# Altium PCB cc-tester.PcbDoc
Units mm, origin at the board's own origin, x right, y up, seen from the top; angles counter-clockwise.
Board outline 80 x 36 mm, 2 copper layers (Top Layer, Bottom Layer); 36 components, 29 nets, 144 pads, 86 vias.
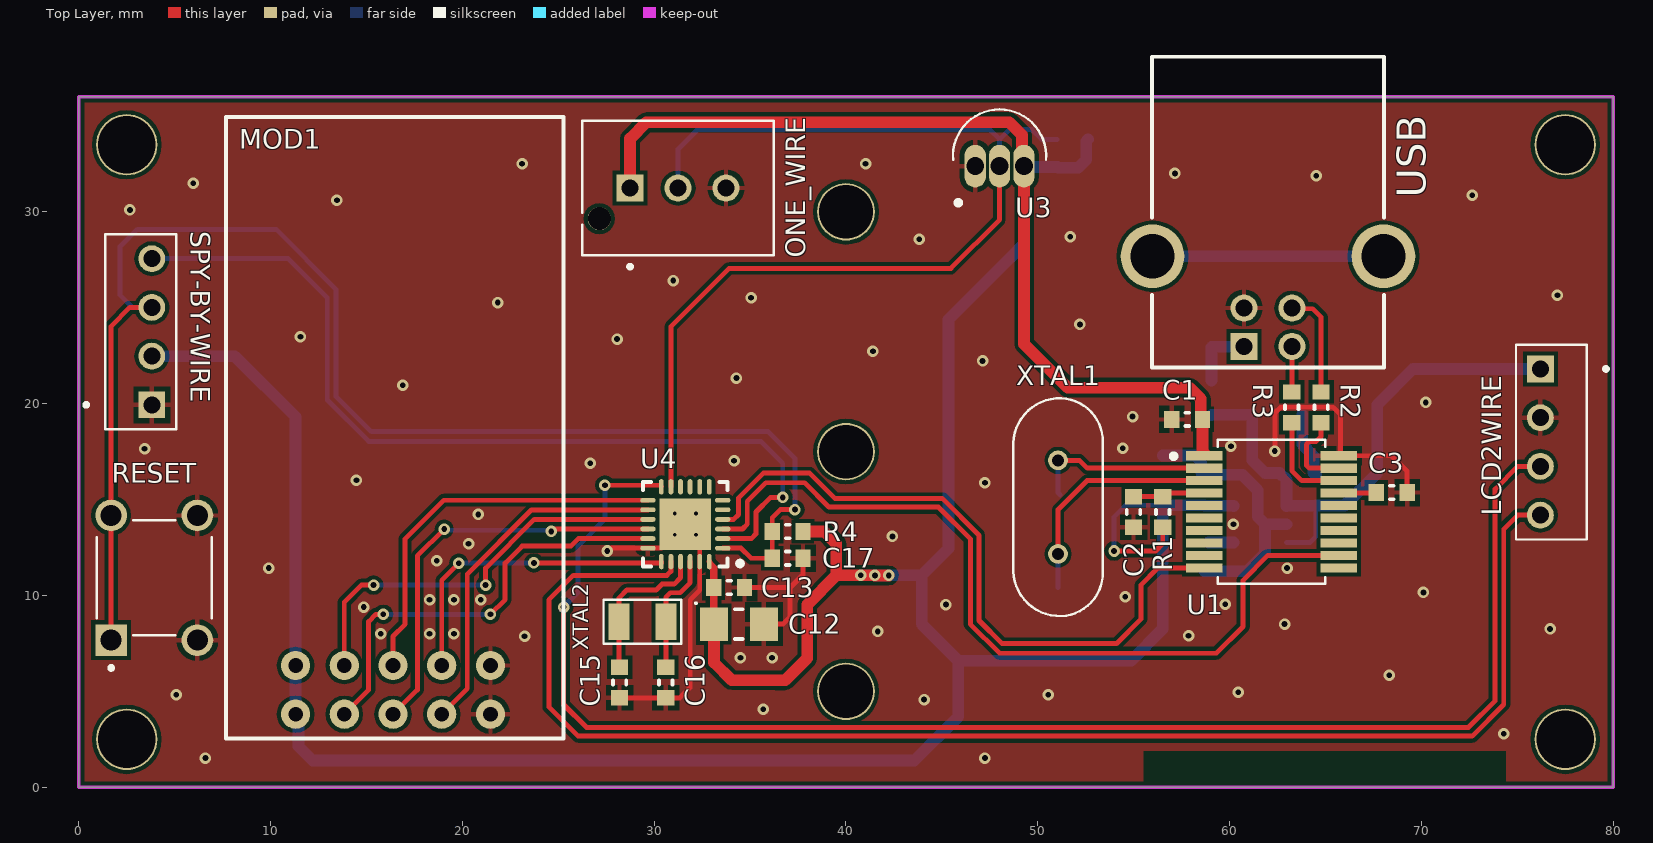
[diagram p0: Top Layer view]
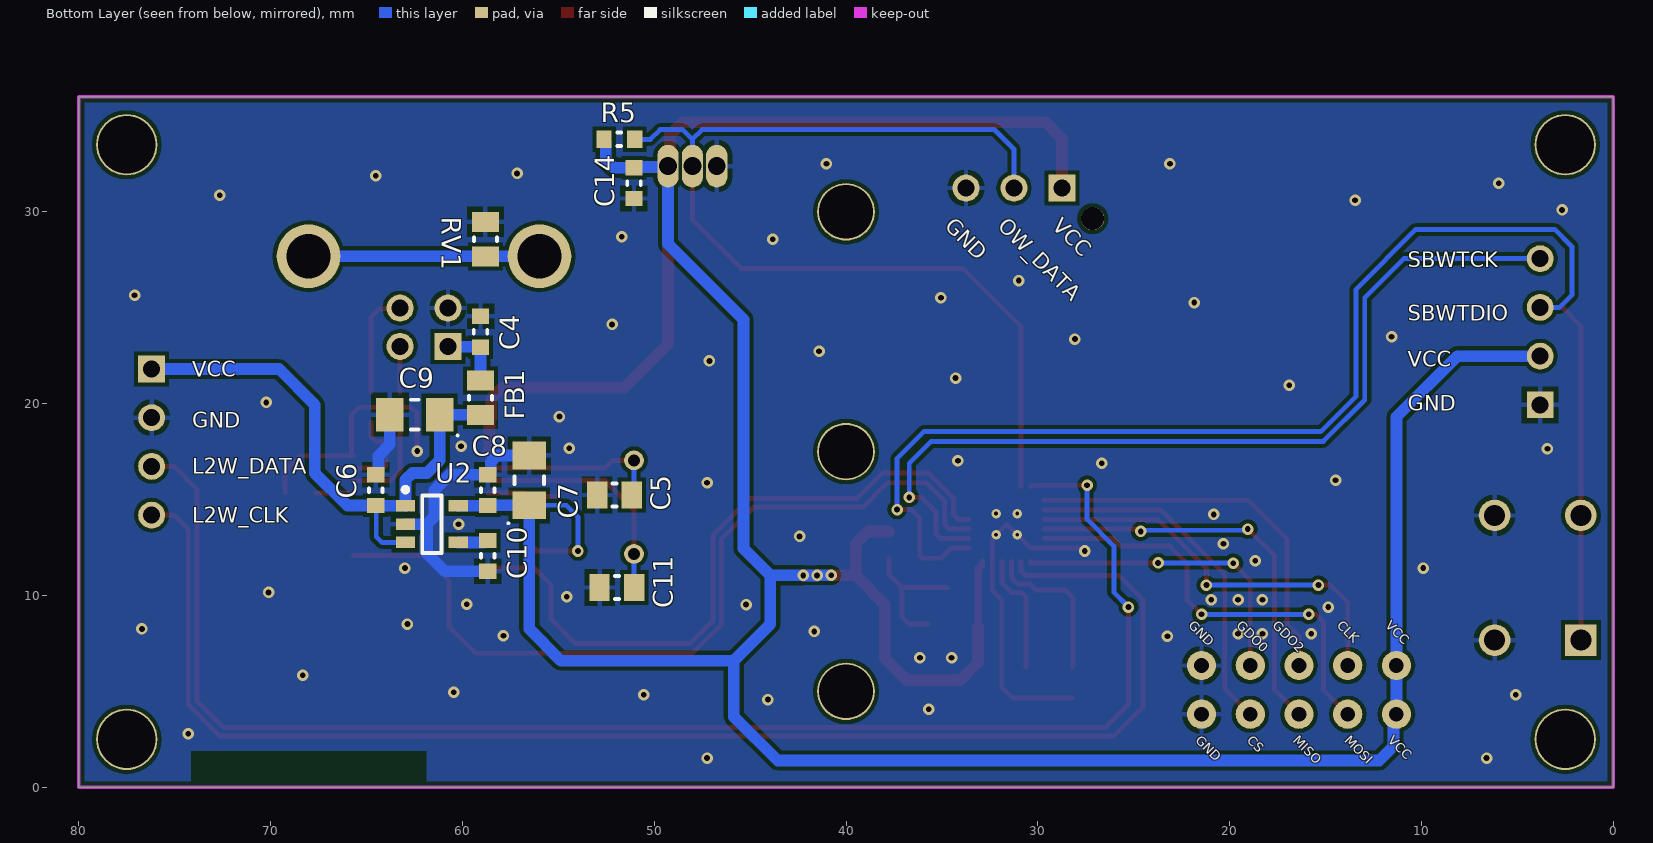
[diagram p1: Bottom Layer view, seen from below]

## Layer stack, top to bottom
Top Solder: solder mask 0.0102, Solder Resist, Dk 3.5
Top Layer: signal copper 0.0356
Dielectric 1: dielectric 0.32, FR-4, Dk 4.8
Bottom Layer: signal copper 0.0356
Bottom Solder: solder mask 0.0102, Solder Resist, Dk 3.5

## Board outline
0,0 80,0 80,36 0,36

## Design rules (kind name [scope] priority, off if disabled: settings)
Clearance [All] p1: gap=0.2 ignorepadtopadclearanceinfootprint=FALSE except(0: Arc-Hole Track-Hole SMDPad-Hole THPad-Hole Via-Hole Fill-Hole Poly-Hole Region-Hole Text-Hole; 0.127: Arc-SMDPad Arc-THPad Arc-Text Track-SMDPad Track-THPad Track-Text SMDPad-SMDPad SMDPad-THPad SMDPad-Text THPad-THPad THPad-Text Via-Text Fill-Text Poly-Text Region-Text Text-Text)
PolygonConnect [All] p1: thpad.connectstyle=Relief thpad.reliefconductorwidth=0.254 thpad.reliefentries=4 thpad.polygonreliefangle="90 Angle" thpad.airgapwidth=0.254 smdpad.connectstyle=Relief smdpad.reliefconductorwidth=0.254 smdpad.reliefentries=4 smdpad.polygonreliefangle="90 Angle" smdpad.airgapwidth=0.254 via.connectstyle=Direct via.reliefconductorwidth=0.254 via.reliefentries=4 via.polygonreliefangle="90 Angle" via.airgapwidth=0.254
RoutingVias [All] p1: holewidth=0.711 width=1.27 viastyle="Through Hole" minholewidth=0.711 minwidth=1.27 maxholewidth=0.711 maxwidth=1.27
SolderMaskExpansion [All] p1: expansion=0.102 istentingtop=FALSE
Width [All] p1: maxlimit=2.54 minlimit=0.254 preferedwidth=0.254 minimp=50.000000 maximp=50.000000 favimp=50.000000
30 further rules are at their usual default settings.

## Components (designator, comment, footprint, x,y, rotation, side; value= is the part's Value field where it differs from the comment)
C1 "100nF" "SMD 0603 GENERIC" 57.785,19.177 r180 top
C2 "100nF" "SMD 0603 GENERIC" 54.991,14.351 r90 top
C3 "100nF" "SMD 0603 GENERIC" 68.453,15.367 r0 top
C4 "10nF" "SMD 0603 GENERIC" 59.055,23.749 r90 bottom
C5 "22pF" "SMD 0805 GENERIC" 52.07,15.24 r180 bottom
C6 "100nF" "SMD 0603 GENERIC" 64.516,15.494 r270 bottom
C7 "10uF" "SMD 1206 POLARIZED" 56.515,16.002 r90 bottom
C8 "100nF" "SMD 0603 GENERIC" 58.674,15.494 r270 bottom
C9 "10uF" "SMD 1206 POLARIZED" 62.484,19.431 r0 bottom
C10 "10nF" "SMD 0603 GENERIC" 58.674,12.065 r90 bottom
C11 "22pF" "SMD 0805 GENERIC" 51.943,10.414 r180 bottom
C12 "4,7uF" "SMD 1206 POLARIZED" 34.417,8.509 r0 top
C13 "100nF" "SMD 0603 GENERIC" 33.909,10.414 r180 top
C14 "100nF" "SMD 0603 GENERIC" 51.054,31.496 r90 bottom
C15 "12pF" "SMD 0603 GENERIC" 28.194,5.461 r90 top
C16 "12pF" "SMD 0603 GENERIC" 30.607,5.461 r90 top
C17 "1nF" "SMD 0603 GENERIC" 36.957,11.938 r180 top
FB1 "11R 100 MHz 1.5A" "SMD 0805 GENERIC" 59.055,20.309 r90 bottom
LCD2WIRE "LCD2WIRE" "THT CON 4-PIN 2.54 WHITE" 76.2,18 r270 top (schematic designator J2)
MOD1 "CC1101" "THT MOD CC1101 433 MHz AMAZON" 25.273,2.54 r90 top
ONE_WIRE "" "THT CON TE 1744418-3 2.5" 31.242,31.242 r0 top (schematic designator J3)
R1 "10K" "SMD 0603 GENERIC" 56.515,14.351 r270 top
R2 "22R" "SMD 0603 GENERIC" 64.77,19.812 r270 top
R3 "22R" "SMD 0603 GENERIC" 63.246,19.812 r270 top
R4 "47K" "SMD 0603 GENERIC" 36.957,13.335 r0 top
R5 "4K7" "SMD 0603 GENERIC" 51.816,33.782 r0 bottom
RESET "RESET" "THT SWC OMRON B3F-1022" 3.81,10.922 r90 top (schematic designator S1)
RV1 "18VDC 180pF" "SMD 0805 GENERIC" 58.801,28.575 r270 bottom
SPY-BY-WIRE "SPY-BY-WIRE" "THT CON 4-PIN 2.54 WHITE" 3.81,23.749 r90 top (schematic designator J4)
U1 "MCP2200-I/SS" "SMD SSOP-20" 62.103,14.478 r0 top
U2 "TPS79333DBVR" SOT23-5 61.595,13.716 r180 bottom
U3 "DS18B20" "THT TO-92 SMALL" 48.006,32.383 r0 top
U4 "MSP430FR2433" VQFN-24 31.623,13.716 r180 top
USB "USB" "THT CON USB 2.0 RA" 62,27.305 r180 top (schematic designator J1)
XTAL1 "12.0 MHz" "THT XTAL HC49" 51.054,14.605 r90 top
XTAL2 "32.768 KHz" "SMD-2 XTAL ABRACON" 29.388,8.636 r180 top

## Footprints (in the part's own frame and the unit in brackets; to place one, negate y for a bottom-side part, rotate by r counter-clockwise, add the part's x,y. Pads: shape width x height; smd on the part's side, far side on the other; paste and mask are expansions set on the pad)
"SMD 0603 GENERIC" [mm]
  rect 0.8x0.9 smd: 1(-0.8,0) 2(0.8,0)
  silkscreen extent -0.1,-0.35 0.1,0.35, body extent -0.85,-0.45 0.85,0.45, height 0.55
"SMD 0805 GENERIC" [mm]
  rect 1.05x1.4 smd: 1(-0.9,0) 2(0.9,0)
  silkscreen extent -0.1,-0.6 0.1,0.6, body extent -1.05,-0.7 1.05,0.7, height 0.6
"SMD 1206 POLARIZED" [mm] "BAUFORM A"
  rect 1.45x1.75 smd: 1(-1.3,0) 2(1.3,0)
  silkscreen extent -2.29,-0.77 0.2,1.14, body extent -1.65,-0.85 1.65,0.85, height 1.6
"SMD SSOP-20" [mm]
  rect 1.9x0.48 smd: 1(-3.429,2.809) 2(-3.429,2.159) 3(-3.429,1.509) 4(-3.429,0.859) 5(-3.429,0.209) 6(-3.429,-0.441) 7(-3.429,-1.091) 8(-3.429,-1.741) 9(-3.429,-2.391) 10(-3.429,-3.041) 11(3.581,-3.041) 12(3.581,-2.391) 13(3.581,-1.741) 14(3.581,-1.091) 15(3.581,-0.441) 16(3.581,0.209) 17(3.581,0.859) 18(3.581,1.509) 19(3.581,2.159) 20(3.581,2.809)
  silkscreen extent -5.12,-3.87 2.88,3.63, body extent -3.85,-3.7 3.95,3.5, height 2
"SMD-2 XTAL ABRACON" [mil]
  rect 43x75 smd: 1(-48,0) 2(48,0)
  silkscreen extent -80,-45 80,45, body extent -98,-65 99,65, height 51
SOT23-5 [mm]
  rect 1x0.6 smd: 1(-1.375,0.95) 2(-1.375,0) 3(-1.375,-0.95) 4(1.375,-0.95) 5(1.375,0.95)
  silkscreen extent -1.5,-1.5 0.5,1.92, body extent -0.88,-1.5 0.87,1.5, height 1.45
"THT CON 4-PIN 2.54 WHITE" [mm]
  rect 1.398x1.398 hole 0.89: 1(-3.81,0)
  round 1.398 hole 0.89: 2(-1.27,0) 3(1.27,0) 4(3.81,0)
  silkscreen extent -5.08,-1.27 5.08,3.52, body extent -5.08,-1.25 5.08,2.4, height 9.5
"THT CON TE 1744418-3 2.5" [mm]
  rect 1.408x1.408 hole 0.9: 1(-2.5,0)
  round 1.408 hole 0.9: 2(0,0) 3(2.5,0)
  round 1.2 hole 1.2 unplated: ""(-4.1,-1.6)
  silkscreen extent -5,-4.2 5,3.5, body extent -5,-3.3 5,3.23, height 8.8
"THT CON USB 2.0 RA" [mm]
  rect 1.408x1.408 hole 0.9: 1(1.25,4.319)
  round 1.408 hole 0.9: 2(-1.25,4.319) 3(-1.25,2.319) 4(1.25,2.319)
  round 3.316 hole 2.3: S1(-6.02,-0.381) S2(6.02,-0.381)
  silkscreen extent -6.05,-10.78 6.05,5.42, body extent -7.25,-10.89 7.25,5.61, height 10.7
"THT MOD CC1101 433 MHz AMAZON" [mil]
  round 60 hole 30: 1(50,550) 2(150,550) 3(50,450) 4(150,450) 5(50,350) 6(150,350) 7(50,250) 8(150,250) 9(50,150) 10(150,150)
  silkscreen extent 0,0 1276,693, body extent -98,0 1270,691, height 118
"THT SWC OMRON B3F-1022" [mm]
  rect 1.65x1.65 hole 1.1: 1(-3.25,2.123)
  round 1.65 hole 1.1: 2(3.25,2.123) 3(-3.25,-2.377) 4(3.25,-2.377)
  silkscreen extent -4.8,-3.13 3,2.87, body extent -3.85,-3.13 3.85,2.87, height 5.2
"THT TO-92 SMALL" [mm]
  oval 1.11x2.22 hole 0.93: 1(-1.27,0.002) 2(0,0.002) 3(1.27,0.002)
  silkscreen extent -2.43,-2.03 2.43,2.96, body extent -2.28,-1.08 2.28,2.54, height 10.45
"THT XTAL HC49" [mm]
  round 1.03 hole 0.63: 1(-2.44,0) 2(2.44,0)
  silkscreen extent -5.68,-2.33 5.68,2.33, body extent -5.68,-2.54 5.68,2.46, height 2.1
VQFN-24 [mm]
  oval 0.8x0.25 smd: 1(-1.95,1.25) 2(-1.95,0.75) 3(-1.95,0.25) 4(-1.95,-0.25) 5(-1.95,-0.75) 6(-1.95,-1.25) 13(1.95,-1.25) 14(1.95,-0.75) 15(1.95,-0.25) 16(1.95,0.25) 17(1.95,0.75) 18(1.95,1.25)
  oval 0.25x0.8 smd: 7(-1.25,-1.95) 8(-0.75,-1.95) 9(-0.25,-1.95) 10(0.25,-1.95) 11(0.75,-1.95) 12(1.25,-1.95) 19(1.25,1.95) 20(0.75,1.95) 21(0.25,1.95) 22(-0.25,1.95) 23(-0.75,1.95) 24(-1.25,1.95)
  rect 2.7x2.7 smd: 25(0,0)
  silkscreen extent -2.98,-2.2 2.2,2.2, body extent -2.05,-2.05 2.05,2.05, height 1

## Part data
C1 C2 C3 C6 C8 C13 C14: library part "CAP SMD CER 100nF 16V 10% X7R 0603"
C4 C10: library part "CAP SMD CER 10nF 16V 10% X7R 0603"
C5 C11: library part "CAP SMD CER 22pF 50V 5% C0G 0805"
C7 C9: library part "CAP SMD TAN 10uF 16V 10% 1206"
C12: library part "CAP SMD TAN 4,7uF 35V 10% 1206"
C15 C16: library part "CAP SMD CER 12pF 25V 10% C0G 0603"
C17: library part "CAP SMD CER 1nF 16V 10% X7R 0603"
FB1: library part "FBD SMD 11R 100MHz 1.5A 0805"
LCD2WIRE: library part "CON THT LCD2WIRE 4-PIN 2.54"
MOD1: library part "MOD RF CC1101 433 MHz AMAZON"
ONE_WIRE: library part "CON THT TE 1744418-3 3-PIN 2.5"
R1: library part "RES SMD 10K 1% 0603"
R2 R3: library part "RES SMD 22R 1% 0603"
R4: library part "RES SMD 47K 1% 0603"
R5: library part "RES SMD 4K7 1% 0603"
RESET: library part "SWC OMRON B3F-1022"
RV1: library part "VAR SMD 18VDC 180pF 0805"
SPY-BY-WIRE: library part "CON THT SPY-BY-WIRE 4-PIN 2.54"
U1: library part "COM TRN UART MCP2200-I/SS"
U2: library part "PWR TPS79333DBVR"
U3: library part "SNS TMP DS18B20"
U4: library part "MCU MSP430FR2433IRGET"
USB: library part "CON THT USB 2.0 B RA", "USB-B (USB TYPE-B) USB 2.0 Receptacle Connector 4 Position Through Hole, Right Angle"
XTAL1: library part "XTAL THT 12.0 MHz HC49"
XTAL2: library part "XTAL SMD 32.768 KHz ABRACON"

## Free pads (board coordinates)
  round 3.2 hole 3: 1(2.5,2.5) 1(2.5,33.5) 1(77.5,2.5) 1(77.5,33.5)
  round 3 hole 2.8: 2(40,5) 2(40,17.5) 2(40,30)

## Via types
v1: diameter 0.6, hole 0.3, Top Layer to Bottom Layer, tented both sides, 82 vias
v2: diameter 0.5, hole 0.2, Top Layer to Bottom Layer, 4 vias

## Nets (pads, with @x,y where several pads share a name; then routed paths per layer and width w, separated by ;. In a path a pad name is that pad's centre, name@x,y a point inside that pad or via, vN(x,y) a via of type N, cw(c..) or ccw(c..) an arc to the next point about the centre after c; other vN are vias at no path point)
3V3: C1.1 C7.1 C8.2 C12.1 C13.2 C14.2 MOD1.1 MOD1.2 ONE_WIRE.1 R1.2 R4.2 R5.2 SPY-BY-WIRE.2 U1.1 U2.5 U3.3 U4.24 | length 201
  Top Layer w0.254: v1(53.975,12.319) 56.134,12.319 56.515,12.7 R1.2
  Top Layer w0.305: U4.24 32.9,11.739 U4.24@32.9,11.569
  Top Layer w0.406: U4.24@32.951,11.569 33.109,11.411 C13.2 33.109,8.39 33.117,8.398 C12.1
  Top Layer w0.61: ONE_WIRE.1 28.742,33.822 29.591,34.671 48.514,34.671 49.18,34.005 49.18,32.481 U3.3 49.276,23.114 51.562,20.828 57.912,20.828 58.49,20.25 58.49,19.272 C1.1 58.585,17.525 U1.1@58.674,17.436 ; C12.1@33.117,8.398 33.117,6.507 34.036,5.588 36.322,5.588 ; 36.318,5.587 36.829,5.587 37.973,6.731 37.973,9.525 39.497,11.049 ; R4.2 38.862,13.335 39.497,12.7 39.497,11.049 ; v1(41.506,11.046) 41.508,11.044 v1(42.23,11.044) ; v1@41.506,11.05 v1(40.767,11.05) 39.497,11.049
  Bottom Layer w0.254: v1(53.975,12.319) 53.975,14.097 54.58,14.702 C7.1@56.388,14.702
  Bottom Layer w0.61: SPY-BY-WIRE.2 8.128,22.479 11.303,19.304 MOD1.2 MOD1.1 11.456,3.657 11.456,2.133 12.192,1.397 43.561,1.397 45.847,3.683 45.847,6.604 ; v1(40.767,11.05) 41.503,11.05 v1(41.506,11.046) 42.228,11.046 v1(42.23,11.044) ; v1@42.241,11.049 43.942,11.049 ; R5.2 52.521,33.687 52.521,32.709 52.108,32.296 C14.2 51.009,32.34 49.321,32.34 U3.3 49.276,28.321 45.339,24.384 45.339,12.446 43.942,11.049 ; C7.1 C7.1@56.515,14.698 ; U2.5 60.215,14.671 58.697,14.671 C8.2 58.67,14.698 C7.1@56.515,14.698 ; 43.942,11.049 43.942,8.509 45.847,6.604 ; 45.847,6.604 54.864,6.604 56.515,8.255 C7.1@56.515,14.698
5V: C6.2 C9.1 FB1.1 LCD2WIRE.1 U2.1 U2.3 | length 29.6
  Bottom Layer w0.254: U2.3 64.201,12.766 64.493,13.058 C6.2@64.493,14.671
  Bottom Layer w0.61: FB1.1 59.066,19.42 61.173,19.42 C9.1 61.184,17.048 61.849,16.383 62.611,16.383 62.97,16.024 U2.1 62.975,14.671 C6.2@64.493,14.671 ; C6.2 66.002,14.694 67.691,16.383 67.691,19.939 69.562,21.81 LCD2WIRE.1
CC1101_CLK: MOD1.4 U4.15 | length 21.4
  Top Layer w0.254: MOD1.4 13.843,9.652 14.732,10.541 v1(15.367,10.541) ; v1(21.209,10.541) 21.209,11.43 23.745,13.966 U4.15
  Bottom Layer w0.254: v1(15.367,10.541) v1(21.209,10.541)
CC1101_CS: MOD1.7 U4.14 | length 18.7
  Top Layer w0.254: MOD1.7 20.251,5.138 20.251,11.114 23.603,14.466 U4.14
CC1101_GDO0: MOD1.8 U4.19 | length 16.5
  Top Layer w0.254: MOD1.8 19.05,6.477 18.923,6.604 18.923,10.795 v1(19.812,11.684) ; v1(23.733,11.7) 23.973,11.7 23.989,11.684 30.371,11.684 30.373,11.686 U4.19
  Bottom Layer w0.254: v1(19.812,11.684) 19.828,11.7 v1(23.733,11.7)
CC1101_GDO2: MOD1.6 U4.13 | length 20.4
  Top Layer w0.254: MOD1.6 16.383,7.874 17.018,8.509 17.018,12.954 19.03,14.966 U4.13
CC1101_MISO: MOD1.5 U4.16 | length 21.6
  Top Layer w0.254: MOD1.5 16.383,3.937 16.637,3.937 16.637,4.064 17.653,5.08 17.653,12.065 v1(19.05,13.462) ; v1(24.638,13.339) 24.763,13.464 29.671,13.464 U4.16
  Bottom Layer w0.254: v1(19.05,13.462) 19.111,13.401 24.576,13.401 v1(24.638,13.339)
CC1101_MOSI: MOD1.3 U4.17 | length 22.8
  Top Layer w0.254: MOD1.3 15.113,5.08 15.113,8.636 15.494,9.017 v1(15.875,9.017) ; v1(21.463,9.017) 22.225,9.779 22.225,11.684 23.114,12.573 25.654,12.573 26.047,12.966 U4.17
  Bottom Layer w0.254: v1(15.875,9.017) v1(21.463,9.017)
DS18B20: ONE_WIRE.2 R5.1 U3.2 U4.11 | length 54.8
  Top Layer w0.254: U4.11 30.873,24.015 33.909,27.051 45.466,27.051 48.006,29.591 U3.2
  Bottom Layer w0.254: ONE_WIRE.2 31.242,33.274 32.258,34.29 47.498,34.29 48.006,33.782 ; U3.2 48.006,33.782 ; R5.1 50.2,33.782 49.692,34.29 48.514,34.29 48.006,33.782
GND: C1.2 C2.1 C3.2 C4.2 C5.1 C6.1 C7.2 C8.1 C9.2 C10.1 C11.1 C12.2 C13.1 C14.1 C15.1 C16.1 C17.1 LCD2WIRE.2 MOD1.9 MOD1.10 ONE_WIRE.3 RESET.3 RESET.4 RV1.1 SPY-BY-WIRE.1 U1.20 U2.2 U3.1 U4.18 U4.23 U4.25 USB.4 | length 55.3
  Top Layer w0.254: v1(27.559,12.319) 27.653,12.319 27.8,12.466 U4.18 29.675,12.468 30.375,12.468 U4.25 v2(32.173,13.166) 32.373,12.966 U4.23 32.373,10.275 31.877,9.779 31.877,5.207 31.331,4.661 C16.1 C15.1 ; C13.1 37.084,10.414 ; C12.2 36.703,8.509 37.084,8.89 37.084,10.414 ; C17.1 37.757,11.087 37.084,10.414 ; v1(62.357,17.526) 62.357,19.512 62.657,19.812 65.405,19.812 65.786,19.431 65.786,17.389 U1.20 68.438,17.287 69.253,16.472 C3.2
  Bottom Layer w0.61: C7.2 58.172,17.302 58.529,16.945 58.529,16.389 58.624,16.294 C8.1 60.668,16.294 61.468,15.494 61.468,14.097 61.849,13.716 ; C10.1 60.922,11.265 61.849,12.192 61.849,13.716 ; U2.2 61.849,13.716 ; C9.2 63.784,17.877 64.371,17.29 64.371,16.389 64.466,16.294 C6.1
  other v1: 6.604,1.524 47.244,1.524 74.295,2.794 35.687,4.064 44.069,4.572 5.08,4.826 50.546,4.826 60.452,4.953 68.326,5.842 34.494,6.753 36.145,6.753 23.241,7.874 57.862,7.896 15.748,8.001 18.288,8.001 19.558,8.001 41.656,8.128 76.708,8.255 62.865,8.509 14.859,9.398 45.212,9.525 59.767,9.547 18.288,9.779 19.558,9.779 20.955,9.779 54.56,9.928 70.104,10.16 9.906,11.43 62.992,11.43 18.669,11.811 20.32,12.7 42.418,13.081 60.198,13.716 20.828,14.224 47.244,15.875 14.478,16.002 26.67,16.891 34.163,17.018 3.429,17.653 54.433,17.675 60.071,17.78 54.941,19.326 70.231,20.066 16.891,20.955 34.29,21.336 47.117,22.225 41.402,22.733 28.067,23.368 11.557,23.495 52.197,24.13 21.844,25.273 35.052,25.527 77.089,25.654 30.988,26.416 43.815,28.575 51.689,28.702 2.667,30.099 13.462,30.607 72.644,30.861 5.969,31.496 64.516,31.877 57.15,32.004 23.114,32.512 41.021,32.512
  other v2: 31.073,13.166 31.073,14.266 32.173,14.266
NetC2_2: C2.2 R1.1 U1.4 | length 3.8
  Top Layer w0.254: C2.2 R1.1 56.701,15.337 U1.4
NetC3_1: C3.1 U1.17 | length 2
  Top Layer w0.254: U1.17 67.623,15.337 C3.1
NetC4_1: C4.1 FB1.2 USB.1 | length 3.5
  Bottom Layer w0.61: FB1.2 C4.1 59.073,22.967 60.731,22.967 USB.1
NetC5_2: C5.2 U1.2 XTAL1.2 | length 9.6
  Top Layer w0.254: XTAL1.2 52.17,17.045 52.578,16.637 U1.2
  Bottom Layer w0.254: XTAL1.2 51.054,15.356 C5.2
NetC10_2: C10.2 U2.4 | length 1.3
  Bottom Layer w0.61: C10.2@58.879,12.766 U2.4
NetC11_2: C11.2 U1.3 XTAL1.1 | length 12.3
  Top Layer w0.254: XTAL1.1 51.054,14.478 52.563,15.987 U1.3
  Bottom Layer w0.254: C11.2 51.054,10.425 XTAL1.1
NetC15_2: C15.2 U4.21 XTAL2.2 | length 8.1
  Top Layer w0.254: C15.2 28.169,6.286 XTAL2.2 28.169,9.881 28.575,10.287 30.099,10.287 30.407,10.595 31.042,10.595 31.373,10.926 U4.21
NetC16_2: C16.2 U4.22 XTAL2.1 | length 6.3
  Top Layer w0.254: C16.2 XTAL2.1 30.607,9.906 30.842,10.141 31.35,10.141 31.873,10.664 U4.22
NetC17_2: C17.2 R4.1 RESET.1 RESET.2 SPY-BY-WIRE.3 U4.1 | length 76
  Top Layer w0.254: RESET.1 RESET.2 1.687,24.039 2.667,25.019 SPY-BY-WIRE.3 ; U4.1 34.524,12.466 35.052,11.938 36.03,11.938 36.157,12.065 R4.1 36.157,14.059 36.576,14.478 v1(37.338,14.478)
  Bottom Layer w0.254: SPY-BY-WIRE.3 2.794,25.019 2.159,25.654 2.159,28.194 3.048,29.083 10.287,29.083 13.408,25.962 13.408,20.381 15.247,18.542 35.941,18.542 37.338,17.145 v1(37.338,14.478)
NetJ1_S1: RV1.2 USB.S1 USB.S2 | length 12
  Bottom Layer w0.61: USB.S2 USB.S1
NetJ2_3: LCD2WIRE.3 U4.12 | length 79
  Top Layer w0.254: v1(25.273,9.398) 25.273,4.318 26.47,3.121 72.456,3.121 73.841,4.506 73.841,15.548 75.023,16.73 LCD2WIRE.3 ; v1(27.432,15.748) 30.291,15.748 U4.12
  Bottom Layer w0.254: v1@25.146,9.271 v1(25.273,9.398) 26.035,10.16 26.035,12.573 27.432,13.97 v1(27.432,15.748)
NetJ2_4: LCD2WIRE.4 U4.20 | length 75.5
  Top Layer w0.254: U4.20 30.871,11.764 30.871,11.259 30.661,11.049 25.781,11.049 24.511,9.779 24.511,4.191 26.035,2.667 72.644,2.667 74.295,4.318 74.295,13.462 75.023,14.19 LCD2WIRE.4
NetJ4_4: SPY-BY-WIRE.4 U4.2 | length 46.9
  Top Layer w0.254: U4.2 35.064,12.966 35.306,13.208 35.306,14.351 36.068,15.113 v1(36.703,15.113)
  Bottom Layer w0.254: SPY-BY-WIRE.4 10.922,27.559 12.954,25.527 12.954,20.193 15.113,18.034 35.56,18.034 36.703,16.891 v1(36.703,15.113)
NetR2_2: R2.2 U1.19 | length 4.5
  Top Layer w0.254: R2.2 64.77,18.288 64.516,18.034 64.157,18.034 64.008,17.885 64.008,16.786 64.157,16.637 U1.19
NetR3_2: R3.2 U1.18 | length 5.2
  Top Layer w0.254: R3.2 63.246,16.51 63.769,15.987 U1.18
UART_RX: U1.10 U4.4 | length 35.6
  Top Layer w0.254: U4.4 33.575,13.968 34.142,13.968 34.398,14.224 34.398,15.094 35.687,16.383 38.1,16.383 39.424,15.059 45.012,15.059 46.936,13.135 46.936,8.697 48.14,7.493 54.102,7.493 55.372,8.763 55.372,10.541 56.268,11.437 U1.10
UART_TX: U1.12 U4.3 | length 43.6
  Top Layer w0.254: U4.3 34.602,13.466 34.852,13.716 34.852,14.906 35.821,15.875 37.846,15.875 39.116,14.605 44.824,14.605 46.482,12.947 46.482,8.509 48.006,6.985 59.309,6.985 60.706,8.382 60.706,10.795 61.998,12.087 U1.12
USB_DM: R3.1 USB.2 | length 2.4
  Top Layer w0.254: R3.1 63.25,20.616 USB.2
USB_DP: R2.1 USB.3 | length 5.6
  Top Layer w0.254: USB.3 63.29,24.946 64.335,24.946 64.77,24.511 R2.1
pads on no net: ONE_WIRE. U1.5 U1.6 U1.7 U1.8 U1.9 U1.11 U1.13 U1.14 U1.15 U1.16 U4.5 U4.6 U4.7 U4.8 U4.9 U4.10

## Polygon pours and split planes (outlines as drawn)
GND on Bottom Layer "GND_L02_P006" (solid, remove dead copper, pour order 6): 0,36 80,36 80,0 74.168,0 74.168,1.903 61.849,1.907 61.849,0 0,0
GND on Top Layer "GND_L01_P007" (solid, remove dead copper, pour order 7): 0,36 80,36 80,0 74.422,0 74.422,1.905 55.499,1.905 55.499,0 0,0

## Keep-outs
Keep-Out Layer:
  the board outline again, w0.2

## Silkscreen, mask and mechanical layers (free items; w line width, h text height)
Bottom Overlay:
  text "VCC" at 29.308,29.21 h0.8 r45
  text "OW_DATA" at 32.135,29.21 h0.8 r45
  text "GND" at 34.896,29.21 h0.8 r45
  text "SBWTCK" at 10.722,27.124 h0.8
  text "SBWTDIO" at 10.722,24.33 h0.8
  text "VCC" at 10.722,21.917 h0.8
  text "VCC" at 74.095,21.409 h0.8
  text "GND" at 10.722,19.631 h0.8
  text "GND" at 74.095,18.742 h0.8
  text "L2W_DATA" at 74.095,16.335 h0.8
  text "L2W_CLK" at 74.095,13.795 h0.8
  text "VCC" at 11.902,8.407 h0.5 r45
  text "CLK" at 14.442,8.407 h0.5 r45
  text "GDO2" at 17.801,8.407 h0.5 r45
  text "GDO0" at 19.671,8.407 h0.5 r45
  text "GND" at 22.189,8.407 h0.5 r45
  text "VCC" at 11.775,2.396 h0.5 r45
  text "MOSI" at 14.061,2.396 h0.5 r45
  text "MISO" at 16.728,2.396 h0.5 r45
  text "CS" at 19.141,2.396 h0.5 r45
  text "GND" at 21.808,2.396 h0.5 r45
Top Solder:
  text "CC TRANSCEIVER V1.0" at 55.88,0.508 h1
Bottom Solder:
  text "SB.ATVIE.0521" at 73.926,0.499 h1